# EAGLE board board (EAGLE 9.3.2)
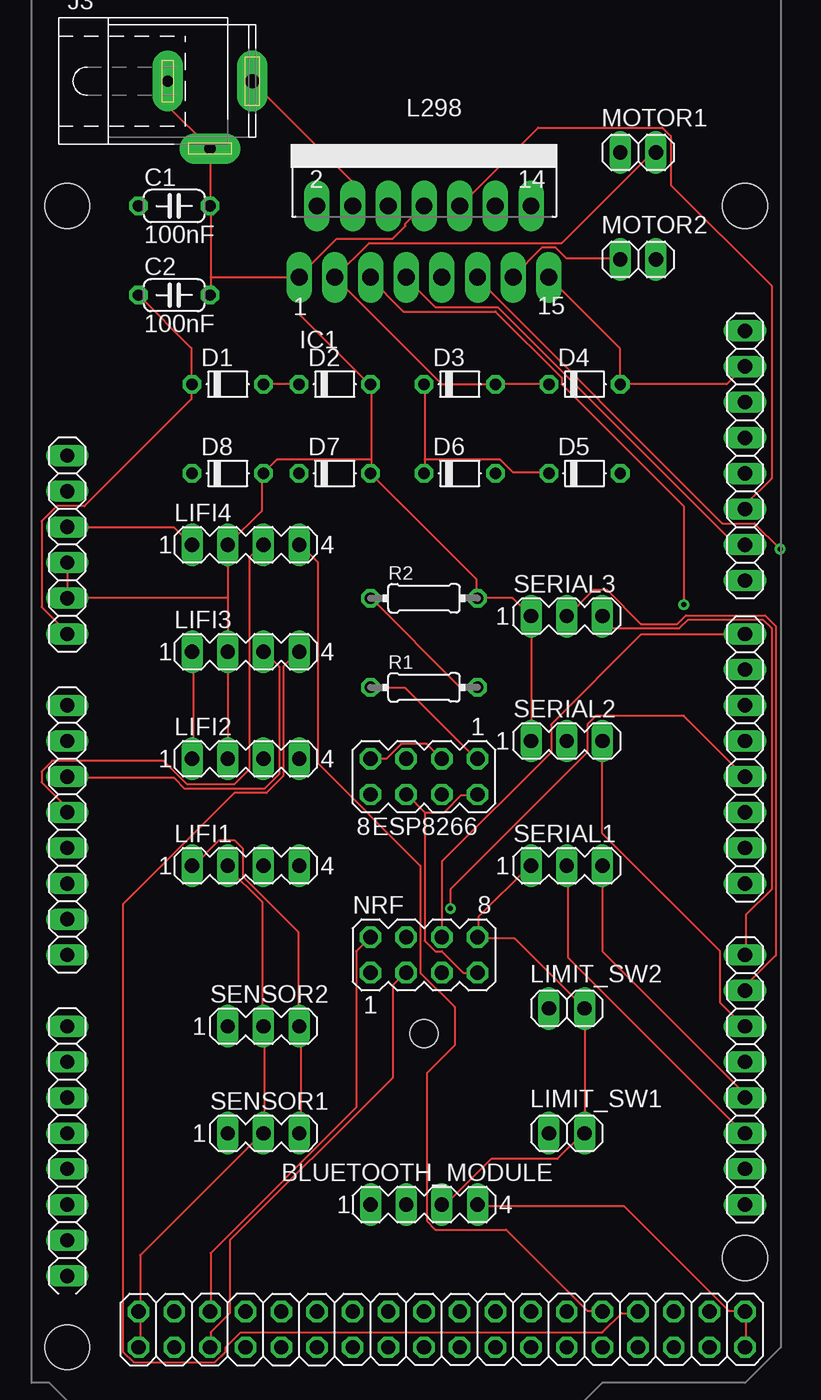
[diagram p0: board, top side]
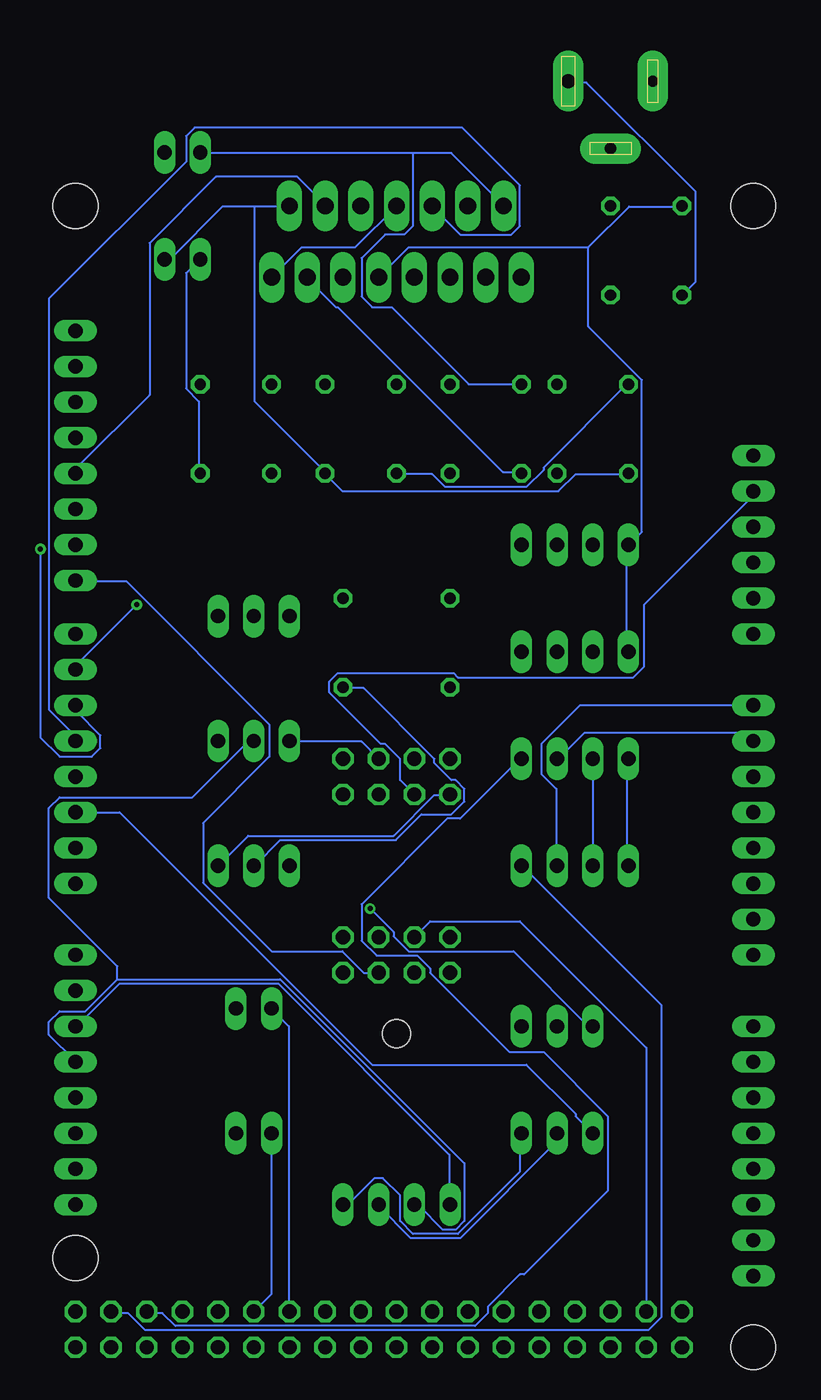
[diagram p1: board, bottom side, seen from below]

No outline drawn. Coordinates in mm, seen from the top.
Copper layers (1*16): Top 0.035mm / dielectric 1.5mm / Bottom 0.035mm
Design rules "default": minimum track width 6mil, minimum drill 0.35mm, track to track 6mil, track to pad 6mil, pad to pad 6mil, via to via 6mil, smd to smd 6mil, copper to edge 40mil, drill to drill 6mil, minimum pad ring 10mil, minimum via ring 8mil, stop-mask expansion 4mil, vias tented up to drill 0mil, thermal gap 10mil

## Footprints (pad centres in the part's own frame; a part is rotated, then mirrored left to right if it is on the bottom)
MA04-1 = drill 1.016 long: 1 -3.81,0; 2 -1.27,0; 3 1.27,0; 4 3.81,0
C050-024X044 = drill 0.813 octagon: 1 -2.54,0; 2 2.54,0
D-5 = drill 0.813 octagon: A 2.54,0; C -2.54,0
MA04-2 = drill 1.016 octagon: 1 -3.81,-1.27; 2 -3.81,1.27; 3 -1.27,-1.27; 4 -1.27,1.27; 5 1.27,-1.27; 6 1.27,1.27; 7 3.81,-1.27; 8 3.81,1.27
MULTIWATT-15 = drill 1.2 long: 1 -8.89,-7.62; 2 -7.62,-2.54; 3 -6.35,-7.62; 4 -5.08,-2.54; 5 -3.81,-7.62; 6 -2.54,-2.54; 7 -1.27,-7.62; 8 0,-2.54; 9 1.27,-7.62; 10 2.54,-2.54; 11 3.81,-7.62; 12 5.08,-2.54; 13 6.35,-7.62; 14 7.62,-2.54; 15 8.89,-7.62
MEGA_ARDUINO_1 = drill 1.016 long: 1 33.02,2.54; 2 35.56,2.54; 3 38.1,2.54; 4 40.64,2.54; 5 43.18,2.54; 6 45.72,2.54; 7 50.8,2.54; 8 53.34,2.54; 9 55.88,2.54; 10 58.42,2.54; 11 60.96,2.54; 12 63.5,2.54; 13 66.04,2.54; 14 68.58,2.54; 15 73.66,2.54; 16 76.2,2.54; 17 78.74,2.54; 18 81.28,2.54; 19 83.82,2.54; 20 86.36,2.54; 21 88.9,2.54; 22 91.44,2.54; 23 86.36,50.8; 24 83.82,50.8; 25 81.28,50.8; 26 78.74,50.8; 27 76.2,50.8; 28 73.66,50.8; 29 71.12,50.8; 30 68.58,50.8; 31 63.5,50.8; 32 60.96,50.8; 33 58.42,50.8; 34 55.88,50.8; 35 53.34,50.8; 36 50.8,50.8; 37 48.26,50.8; 38 45.72,50.8; 39 41.91,50.8; 40 39.37,50.8; 41 36.83,50.8; 42 34.29,50.8; 43 31.75,50.8; 44 29.21,50.8; 45 26.67,50.8; 46 24.13,50.8 | drill 1.016 octagon: 47 93.98,50.8; 48 96.52,50.8; 49 93.98,48.26; 50 96.52,48.26; 51 93.98,45.72; 52 96.52,45.72; 53 93.98,43.18; 54 96.52,43.18; 55 93.98,40.64; 56 96.52,40.64; 57 93.98,38.1; 58 96.52,38.1; 59 93.98,35.56; 60 96.52,35.56; 61 93.98,33.02; 62 96.52,33.02; 63 93.98,30.48; 64 96.52,30.48; 65 93.98,27.94; 66 96.52,27.94; 67 93.98,25.4; 68 96.52,25.4; 69 93.98,22.86; 70 96.52,22.86; 71 93.98,20.32; 72 96.52,20.32; 73 93.98,17.78; 74 96.52,17.78; 75 93.98,15.24; 76 96.52,15.24; 77 93.98,12.7; 78 96.52,12.7; 79 93.98,10.16; 80 96.52,10.16; 81 93.98,7.62; 82 96.52,7.62 | hole 3.2: 15.24,50.8; 15.24,2.54; 90.17,50.8; 96.52,2.54 | hole 2: 74.168,27.94
SPC4077 = drill 0.8 pad 2.184 long: 1 -3,0; 2 0,-4.8 | drill 1 pad 2.184 long: 3 3,0
1X02 = drill 1.016 long: 1 -1.27,0; 2 1.27,0
0204/7 = drill 0.813 octagon: 1 -3.81,0; 2 3.81,0
MA03-1 = drill 1.016 long: 1 -2.54,0; 2 0,0; 3 2.54,0

## Placement (x,y rotation side)
BLUETOOTH_MODULE  [MA04-1]  52.07,13.97 0 top
C1  100nF  [C050-024X044]  34.29,85.09 0 top
C2  100nF  [C050-024X044]  34.29,78.74 0 top
D1  [D-5]  38.1,72.39 0 top
D2  [D-5]  45.72,72.39 0 top
D3  [D-5]  54.61,72.39 0 top
D4  [D-5]  63.5,72.39 0 top
D5  [D-5]  63.5,66.04 0 top
D6  [D-5]  54.61,66.04 0 top
D7  [D-5]  45.72,66.04 0 top
D8  [D-5]  38.1,66.04 0 top
ESP8266  [MA04-2]  52.07,44.45 180 top
IC1  L298  [MULTIWATT-15]  52.07,87.63 0 top
IC2  [MEGA_ARDUINO_1]  24.13,100.33 270 top
J3  [SPC4077]  36.83,93.98 0 top
LIFI1  [MA04-1]  39.37,38.1 0 top
LIFI2  [MA04-1]  39.37,45.72 0 top
LIFI3  [MA04-1]  39.37,53.34 0 top
LIFI4  [MA04-1]  39.37,60.96 0 top
LIMIT_SW1  [1X02]  62.23,19.05 0 top
LIMIT_SW2  [1X02]  62.23,27.94 0 top
MOTOR1  [1X02]  67.31,88.9 0 top
MOTOR2  [1X02]  67.31,81.28 0 top
NRF  [MA04-2]  52.07,31.75 0 top
R1  1k  [0204/7]  52.07,50.8 0 top
R2  2k2  [0204/7]  52.07,57.15 0 top
SENSOR1  [MA03-1]  40.64,19.05 0 top
SENSOR2  [MA03-1]  40.64,26.67 0 top
SERIAL1  [MA03-1]  62.23,38.1 0 top
SERIAL2  [MA03-1]  62.23,46.99 0 top
SERIAL3  [MA03-1]  62.23,55.88 0 top

## Library data of the parts
BLUETOOTH_MODULE ESP8266 LIFI1-LIFI4 NRF SENSOR1 SENSOR2 SERIAL1-SERIAL3 = con-lstb; OC_FARNELL: unknown; OC_NEWARK: unknown
C1 C2 = rcl
D1-D8 = diode
IC1 = st-microelectronics; MPN: L298N; OC_FARNELL: 1589425; OC_NEWARK: 32M1527
IC2 = arduino
J3 = con-jack; OC_FARNELL: unknown; OC_NEWARK: unknown
LIMIT_SW1 LIMIT_SW2 MOTOR1 MOTOR2 = pinhead
R1 R2 = rcl; SPICEPREFIX: R

## Nets
2: IC2.33 SENSOR1.1
3: IC2.34 SENSOR2.1
3V3: ESP8266.2 ESP8266.6 IC2.2 NRF.7
4: IC1.6 IC2.35
5: IC1.11 IC2.36
5V: BLUETOOTH_MODULE.4 C1.1 IC1.9 IC2.3 IC2.47 IC2.48 LIFI1.1 LIFI2.1 LIFI3.1 LIFI4.1 SENSOR1.3 SENSOR2.3
6: IC1.5 IC2.37
7: IC2.38 NRF.6
8: IC2.39 NRF.5
9: IC1.7 IC2.40
10: IC1.10 IC2.41
11: IC1.12 IC2.42
22: IC2.49 LIFI1.4
24: IC2.51 LIFI2.4
26: IC2.53 LIFI3.4
28: IC2.55 LIFI4.4
30: IC2.57 LIMIT_SW1.1
32: IC2.59 LIMIT_SW2.1
A0: IC2.7 LIFI1.3
A1: IC2.8 LIFI2.3
A2: IC2.9 LIFI3.3
A3: IC2.10 LIFI4.3
GND: BLUETOOTH_MODULE.3 C1.2 C2.2 D2.A D4.A D7.A D8.A ESP8266.3 ESP8266.7 IC1.1 IC1.8 IC1.15 IC2.4 IC2.5 IC2.45 IC2.81 IC2.82 J3.1 J3.2 LIFI1.2 LIFI2.2 LIFI3.2 LIFI4.2 LIMIT_SW1.2 LIMIT_SW2.2 NRF.8 R2.2 SENSOR1.2 SENSOR2.2 SERIAL1.1 SERIAL2.1 SERIAL3.1
MISO: IC2.77 NRF.2
MOSI: IC2.78 NRF.3
N$1: D1.A D2.C IC1.2 MOTOR1.1
N$2: D3.A D4.C IC1.3 MOTOR1.2
N$3: D6.A D8.C IC1.14 MOTOR2.2
N$4: D5.A D7.C IC1.13 MOTOR2.1
N$5: ESP8266.1 R1.1
N$17: IC2.43
N$18: IC2.44
N$22: NRF.1
N$30: IC2.31
N$31: IC2.32
R1: IC2.25 R1.2 R2.1 SERIAL1.2
R2: BLUETOOTH_MODULE.2 IC2.27 SERIAL2.2
R3: IC2.29 SERIAL3.2
SCK: IC2.79 NRF.4
SS: IC2.80
T1: ESP8266.8 IC2.26 SERIAL1.3
T2: BLUETOOTH_MODULE.1 IC2.28 SERIAL2.3
T3: IC2.30 SERIAL3.3
VIN: C2.1 D1.C D3.C D5.C D6.C IC1.4 IC2.6 J3.3

## Tracks (layer width: path | path; a pad name or v marks a point on that pad's centre or on a via)
2
  Bottom 0.152: SENSOR1.1 39.32,20.27 39.32,20.42 42.82,23.93 53.8,23.93 71.78,41.91 IC2.33
3  (via drill 0.35)
  Top 0.152: v53.95,35.05 53.95,36.42 63.7,46.18 63.7,48.16 64.31,48.77 70.56,48.77 74.83,44.5 IC2.34
  Bottom 0.152: SENSOR2.1 38.41,26.67 43.74,32 51.21,32 52.27,33.07 52.27,33.38 v53.95,35.05
3V3
  Top 0.152: NRF.7 54.86,30.48 53.34,32 52.88,32 52.12,32.77 52.12,41.91 | 52.12,41.91 50.9,43.13 ESP8266.6 | 52.12,41.91 53.49,41.91 54.71,43.13 55.78,43.13 ESP8266.2
  Bottom 0.152: IC2.2 26.67,64.47 34.44,56.69 34.44,52.27 35.2,51.51 47.7,51.51 48.01,51.82 56.24,51.82 56.84,51.21 56.84,50.44 53.19,46.79 52.88,46.79 51.82,45.72 51.82,44.2 ESP8266.6
4
  Bottom 0.152: IC2.35 74.98,47.09 74.98,47.4 76.81,49.23 76.81,78.49 67.06,88.24 67.06,90.07 66.45,90.68 47.4,90.68 43.28,86.56 43.28,83.67 43.89,83.06 47.55,83.06 49.53,85.04 IC1.6
5  (via drill 0.35)
  Top 0.152: v77.42,60.66 75.59,62.48 73.3,62.48 55.78,80.01 IC1.11
  Bottom 0.152: v77.42,60.66 77.42,47.24 76.05,45.87 73.76,45.87 73.15,46.48 73.15,47.4 74.83,49.07 74.83,49.53 IC2.36
5V
  Top 0.152: IC2.48 74.98,3.81 74.98,6.25 IC2.47 74.83,6.4 73.76,6.4 66.29,13.87 55.93,13.87 BLUETOOTH_MODULE.4 | SENSOR1.3 43.28,19.05 43.28,26.67 SENSOR2.3 43.13,26.67 43.13,33.38 39.17,37.34 39.17,39.32 38.56,39.93 37.49,39.93 35.66,38.1 LIFI1.1 | LIFI3.1 35.66,53.34 35.66,45.72 LIFI2.1 | IC2.3 26.67,62.18 34.29,62.18 35.51,60.96 LIFI4.1
  Bottom 0.152: BLUETOOTH_MODULE.4 55.78,14.02 55.47,14.02 53.65,15.85 53.03,15.85 51.82,14.63 51.82,12.8 50.9,11.89 47.7,11.89 43.28,16.31 43.28,19.05 SENSOR1.3 | 38.41,82.14 35.51,85.04 31.85,85.04 C1.1 | 38.41,82.14 51.21,82.14 IC1.9 | LIFI1.1 35.66,38.1 35.66,45.72 LIFI2.1 | LIFI3.1 35.66,53.34 35.66,60.96 LIFI4.1 35.51,60.96 34.59,61.87 34.59,72.69 38.41,76.5 38.41,82.14
6  (via drill 0.35)
  Top 0.152: v70.56,56.69 70.56,63.7 61.87,72.39 61.87,72.85 57.15,77.57 50.6,77.57 48.16,80.01 IC1.5
  Bottom 0.152: v70.56,56.69 74.83,52.43 74.83,52.12 IC2.37
7
  Top 0.152: NRF.6 53.34,38.41 61.11,46.18 61.11,48.16 67.51,54.56 74.83,54.56 IC2.38
8
  Bottom 0.152: NRF.5 54.41,30.48 55.93,32 60.96,32 65.84,36.88 65.84,41.15 61.11,45.87 61.11,48.16 71.32,58.37 74.83,58.37 IC2.39
9
  Top 0.152: IC2.40 74.22,60.96 57.3,77.88 52.88,77.88 50.75,80.01 IC1.7
10
  Top 0.152: IC1.10 60.2,90.68 69.04,90.68 69.65,90.07 69.65,86.56 76.81,79.4 76.81,65.68 74.98,63.86 74.98,63.55 IC2.41
11
  Bottom 0.152: IC2.42 74.83,66.14 74.83,66.45 69.65,71.63 69.65,82.45 64.92,87.17 59.13,87.17 57.15,85.19 IC1.12
22
  Bottom 0.152: IC2.49 72.39,6.25 71.17,6.25 69.95,5.03 34.14,5.03 33.22,5.94 33.22,28.19 43.13,38.1 LIFI1.4
24
  Bottom 0.152: IC2.51 69.8,6.25 68.73,6.25 67.82,5.33 46.48,5.33 45.57,6.25 45.57,6.71 43.28,8.99 42.98,8.99 37.03,14.94 37.03,20.27 41.6,24.84 44.04,24.84 49.68,30.48 49.68,30.79 50.6,31.7 53.49,31.7 54.56,32.77 54.56,35.36 48.46,41.45 47.55,41.45 43.28,45.72 LIFI2.4
26
  Top 0.152: IC2.53 67.21,6.25 66.14,6.25 64.77,4.88 39.01,4.88 37.95,3.81 37.95,3.5 37.19,2.74 31.39,2.74 30.63,3.5 30.63,35.36 38.56,43.28 40.84,43.28 42.06,44.5 42.06,52.27 43.13,53.34 LIFI3.4
28
  Top 0.152: IC2.55 64.77,6.4 63.7,6.4 57.91,12.19 52.88,12.19 52.27,12.8 52.27,23.32 54.25,25.3 54.25,28.04 51.82,30.48 51.82,38.1 44.5,45.41 44.5,59.74 43.28,60.96 LIFI4.4
30
  Bottom 0.152: LIMIT_SW1.1 60.96,7.62 IC2.57
32
  Bottom 0.152: IC2.59 59.74,6.4 59.74,26.67 60.96,27.89 LIMIT_SW2.1
A0
  Bottom 0.152: IC2.7 39.01,49.53 41.76,46.79 41.76,44.65 40.69,43.59 40.69,38.1 LIFI1.3
A1
  Bottom 0.152: LIFI2.3 40.54,45.72 38.71,47.55 27.13,47.55 26.67,47.09 IC2.8
A2
  Top 0.152: IC2.9 26.67,44.35 34.29,44.35 35.05,43.59 40.69,43.59 41.76,44.65 41.76,52.27 40.69,53.34 LIFI3.3
A3
  Top 0.152: IC2.10 26.67,42.22 24.84,44.04 24.84,44.81 25.6,45.57 33.53,45.57 35.2,43.89 38.56,43.89 39.62,44.96 39.62,60.05 40.54,60.96 LIFI4.3
GND
  Top 0.152: IC2.45 74.83,73.61 73.61,72.39 D4.A 65.99,72.39 65.99,74.98 IC1.15 | SERIAL1.1 59.59,38.1 55.93,34.44 55.93,33.07 NRF.8 55.93,32.92 58.52,32.92 LIMIT_SW2.2 63.55,27.89 63.55,19.05 LIMIT_SW1.2 63.4,19.05 61.57,17.22 56.84,17.22 53.65,14.02 53.34,14.02 BLUETOOTH_MODULE.3 | IC2.82 31.85,3.81 31.85,6.25 IC2.81 31.85,6.4 31.85,10.36 40.54,19.05 SENSOR1.2 40.69,19.05 40.69,26.67 SENSOR2.2 40.54,26.67 40.54,35.51 38.1,37.95 LIFI1.2 | 36.88,80.01 36.88,85.04 C1.2 36.88,85.19 36.88,89.15 J3.2 36.73,89.31 33.83,92.2 33.83,93.88 J3.1 | 36.88,80.01 36.88,78.79 C2.2 | 36.88,80.01 43.13,80.01 | ESP8266.7 49.38,45.72 50.44,46.79 52.27,46.79 ESP8266.3 | SERIAL2.1 59.74,47.09 59.74,55.78 SERIAL3.1 59.59,55.93 58.37,57.15 R2.2 55.78,57.15 55.78,58.52 D7.A 48.31,66.14 48.31,67.06 | 48.31,67.06 48.31,72.39 D2.A 48.16,72.39 43.28,77.27 43.28,80.01 IC1.1 43.13,80.01 | IC2.4 IC2.5 38.1,57.15 | 38.1,57.15 LIFI4.2 40.54,63.4 40.54,65.99 D8.A 40.69,66.14 41.6,67.06 48.31,67.06 | 38.1,57.15 LIFI3.2 LIFI2.2 | 43.13,80.01 45.87,82.75 49.84,82.75 50.75,83.67 50.75,83.82 51.97,85.04 IC1.8
  Bottom 0.152: IC1.8 55.02,82.14 58.83,82.14 IC1.15 | ESP8266.3 54.56,46.94 59.59,46.94 SERIAL2.1 | LIFI2.2 LIFI1.2 | BLUETOOTH_MODULE.3 53.34,13.87 51.05,11.58 47.55,11.58 40.69,18.44 40.69,19.05 SENSOR1.2
MISO
  Top 0.152: NRF.2 47.24,32 47.24,20.88 36.88,10.52 36.88,6.4 IC2.77
MOSI
  Top 0.152: IC2.78 36.88,3.81 36.88,4.88 38.25,6.25 38.25,11.43 49.84,23.01 49.84,29.57 50.75,30.48 NRF.3
N$1
  Top 0.152: D2.C D1.A
  Bottom 0.152: 50.9,88.85 48.16,88.85 44.5,85.19 IC1.2 | 50.9,88.85 65.99,88.85 MOTOR1.1 | D2.C 46.94,72.39 52.43,77.88 53.8,77.88 54.56,78.64 54.56,81.38 52.88,83.06 51.51,83.06 50.9,83.67 50.9,88.85
N$2
  Top 0.152: D4.C D3.A 53.34,72.39 IC1.3 48.16,82.45 61.87,82.45 68.28,88.85 68.58,88.85 MOTOR1.2
N$3
  Bottom 0.152: 62.18,85.04 59.74,85.04 IC1.14 | 62.18,85.04 64.47,85.04 68.12,81.38 68.58,81.38 MOTOR2.2 | D8.C 35.66,65.99 39.32,65.99 40.54,64.77 55.93,64.77 57.15,65.99 D6.A 57.15,66.14 62.18,71.17 62.18,85.04
N$4
  Top 0.152: MOTOR2.1 65.99,81.38 62.18,81.38 61.42,82.14 60.5,82.14 58.37,80.01 IC1.13
  Bottom 0.152: D5.A 66.14,66.14 66.14,71.17 67.06,72.08 67.06,80.31 66.14,81.23 MOTOR2.1 | D7.C 43.28,66.14 44.5,66.14 56.24,77.88 56.39,77.88 58.52,80.01 IC1.13
N$5
  Top 0.152: R1.1 48.31,50.75 50.75,50.75 55.78,45.72 ESP8266.1
R1
  Top 0.152: R1.2 55.78,50.9 54.56,50.9 48.31,57.15 R2.1 | SERIAL1.2 62.33,38.1 62.33,31.55 74.83,19.05 IC2.25
  Bottom 0.152: R1.2 55.78,50.75 54.41,50.75 49.38,45.72 49.38,45.41 48.16,44.2 47.85,44.2 47.24,43.59 47.24,42.67 48.16,41.76 50.29,41.76 52.12,39.93 60.35,39.93 62.18,38.1 SERIAL1.2
R2
  Bottom 0.152: 71.93,30.02 60.35,30.02 47.24,16.92 47.24,12.8 47.85,12.19 48.77,12.19 50.44,13.87 50.75,13.87 BLUETOOTH_MODULE.2 | 71.93,30.02 74.22,27.74 76.05,27.74 76.81,26.98 76.81,26.06 74.98,24.23 IC2.27 | 71.93,30.02 71.93,30.94 76.81,35.81 76.81,42.22 76.05,42.98 66.6,42.98 62.64,46.94 62.33,46.94 SERIAL2.2
R3
  Top 0.152: IC2.29 74.98,29.26 74.98,29.57 77.11,31.7 77.11,55.17 76.35,55.93 70.71,55.93 70.1,55.32 67.51,55.32 65.08,57.76 64.16,57.76 62.33,55.93 SERIAL3.2
SCK
  Bottom 0.152: IC2.79 34.29,25.15 43.28,34.14 49.68,34.14 NRF.4
T1
  Top 0.152: SERIAL1.3 64.77,32 74.83,21.95 74.83,21.64 IC2.26
  Bottom 0.152: SERIAL1.3 62.64,40.23 52.27,40.23 49.38,43.13 48.31,43.13 ESP8266.8
T2
  Top 0.152: SERIAL2.3 64.77,40.39 73.15,32 73.15,28.35 74.83,26.67 IC2.28
  Bottom 0.152: BLUETOOTH_MODULE.1 48.31,14.02 48.31,17.53 60.5,29.72 71.78,29.72 74.83,26.67 IC2.28
T3
  Top 0.152: IC2.30 74.98,31.85 74.98,34.59 76.81,36.42 76.81,55.02 76.2,55.63 70.87,55.63 70.26,55.02 65.53,55.02 64.77,55.78 SERIAL3.3
VIN
  Top 0.152: IC1.4 46.94,85.19 46.94,86.87 39.93,93.88 J3.3 | 52.12,67.06 52.12,72.39 D3.C | 52.12,67.06 52.12,66.14 D6.C | 52.12,67.06 57.45,67.06 58.37,66.14 60.96,66.14 D5.C | 35.51,72.39 35.51,74.98 C2.1 | 35.51,72.39 35.51,71.32 27.89,63.7 25.91,63.7 24.84,62.64 24.84,56.54 26.67,54.71 IC2.6 | 35.51,72.39 D1.C
  Bottom 0.152: D6.C 51.97,65.99 49.53,65.99 48.62,65.08 42.82,65.08 41.6,66.29 41.6,66.45 35.66,72.39 D1.C | C2.1 30.79,79.7 30.79,86.11 38.56,93.88 39.78,93.88 J3.3